# Altium PCB Clock Car.PcbDoc (part 2 of 2)
Units mil, origin at the board's own origin, x right, y up, seen from the top; angles counter-clockwise.
Board outline 1450 x 3300 mil, 4 copper layers (TOP, GND, PWR, BOT), stack 60.556 mil thick; 84 components, 67 nets, 314 pads, 152 vias.
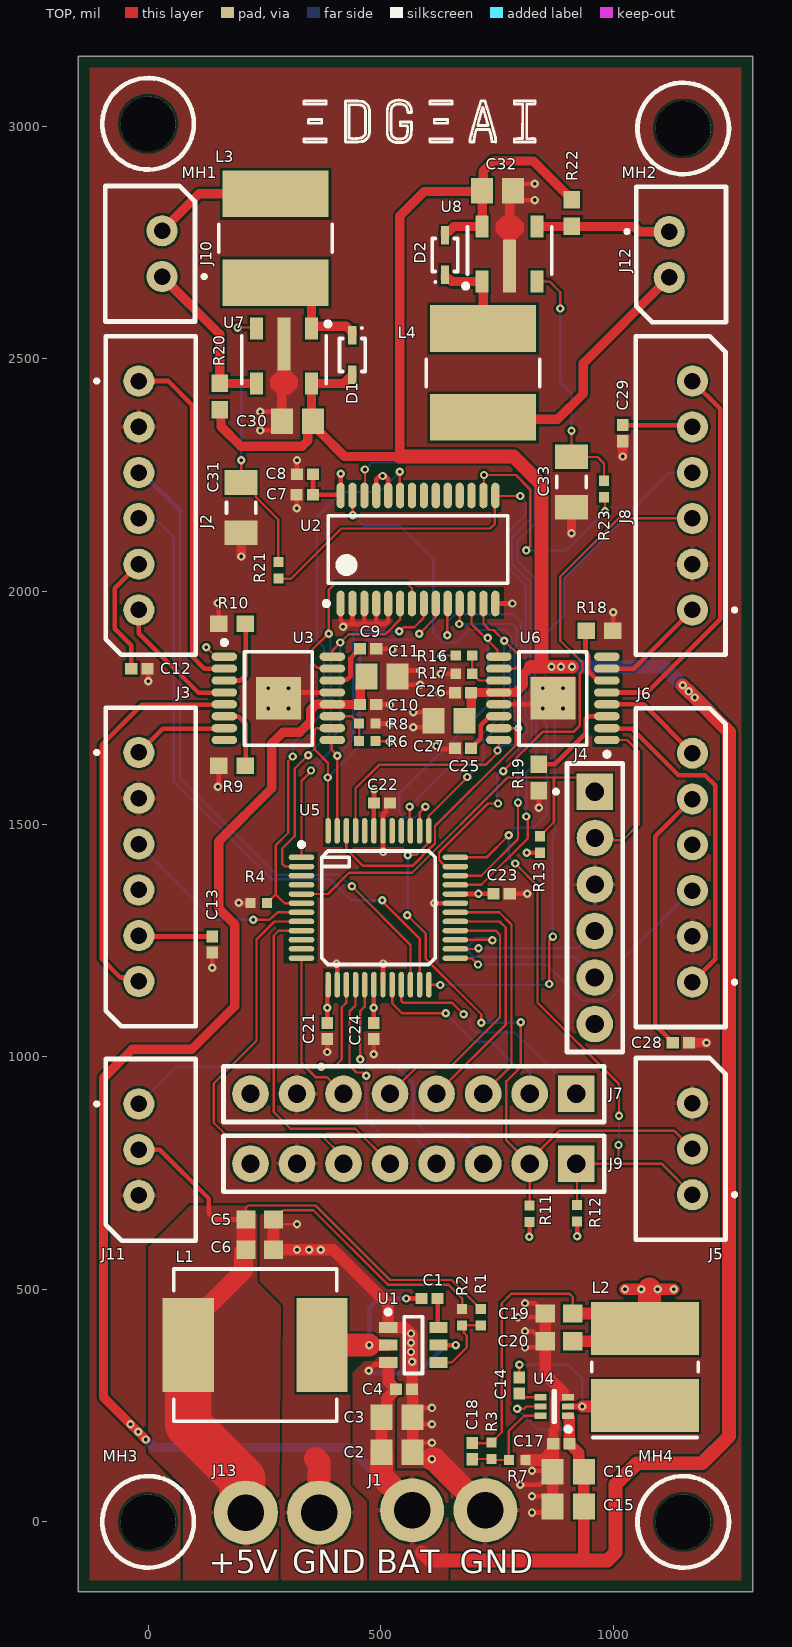
[diagram p0: TOP view]

## Via types
v1: diameter 18/18 (per signal layer), hole 8, TOP to BOT, tented top, 88 vias
v2: diameter 18, hole 8, TOP to BOT, tented top, 56 vias
v3: diameter 19.68, hole 7.87, TOP to BOT, 8 vias

## Nets (pads, with @x,y where several pads share a name; then routed paths per layer and width w, separated by ;. In a path a pad name is that pad's centre, name@x,y a point inside that pad or via, vN(x,y) a via of type N, cw(c..) or ccw(c..) an arc to the next point about the centre after c; other vN are vias at no path point) (continued)
B_ENC_A: (continued)
  TOP w5: v1(226,1294) 260.86,1294 267.33,1300.47 268.47,1300.47 278.16,1310.16 U5.7
  BOT w5: J3.3 142.85,1294 v1(226,1294)
C+: J6.1 U6.2 | length 727.1
  TOP w10: U6.2 987.17,1705 1040,1705 1140,1605 1197,1605 1219,1583 1219,1209 J6.1
C-: J6.6 U6.4 | length 227.4
  TOP w10: U6.4 1064.92,1757.2 J6.6
C_CCW: U2.11 U5.46 U6.15 | length 1018.7
  TOP w5: U5.46 426.1,1445.9 462,1410 568,1410 608.3,1450.3 608.82,1450.3 616.67,1458.15 616.67,1495.67 790,1669 790,1703.09 v1@787.09,1706 ; v1(669,1930) 669.57,1930.57 U2.11 ; U6.15 v1@787.09,1706 ; v1(796.05,1706) v1@787.09,1706
  BOT w5: v1(669,1930) 783,1930 792,1921 792,1883.02 788,1879.02 788,1715.43 796.05,1707.38 v1(796.05,1706)
C_CW: U2.10 U5.45 U6.16 | length 1047.9
  TOP w5: U5.45 445.79,1576.79 496,1627 725,1627 v1@753.5,1655.5 ; v1(643,1905.73) 643,1972.88 U2.10 ; v1@753.86,1658 U6.16
  BOT w5: v1(643,1905.73) 643,1934 660,1951 785,1951 802,1934 802,1878.88 799.5,1876.38 799.5,1730.24 814,1715.74 814,1696 788,1670 763,1670 v1(751,1658)
C_ENC_A: J6.3 U5.25 | length 679.7
  TOP w5: U5.25 695.27,1211.73 v1(709,1198)
  BOT w5: v1(709,1198) 856,1198 934,1120 989,1120 1019,1150 1019,1208 1167.85,1356.85 J6.3
CS: J7.2 U5.20 | length 443.1
  TOP w5: U5.20 524.53,1114.47 546,1093 v1(640,1093)
  BOT w5: v1(640,1093) 701,1032 737,1032 793,976 810,976 820,966 J7.2
D+: J8.1 U6.7 | length 236.9
  TOP w10: U6.7 1041.93,1833.98 1042.95,1832.95 J8.1
D-: J8.6 U6.5 | length 846
  TOP w10: U6.5 1072.8,1782.8 1230,1940 1230,2392.13 J8.6
D_CCW: U2.13 U5.39 U6.10 | length 711.5
  TOP w5: v1(562,1537) 562,1513.34 562.59,1512.75 562.59,1486.66 U5.39 ; U2.13 720.75,1930.25 734,1917 742.5,1917 v1(765.5,1894) 797,1862.5 797,1842 788.98,1833.98 U6.10
  BOT w5: v1(562,1537) 765,1740 765,1811.49 761.5,1814.99 765.5,1818.99 v1(765.5,1894)
D_CW: U2.12 U5.38 U6.9 | length 746.6
  TOP w5: U5.38 583.58,1524.58 v1(596,1537) ; U2.12 695,1973.7 695,1930 742,1883 ; v1(730,1900) 730,1895 742,1883 ; U6.9 751,1862.43 751,1874 742,1883
  BOT w5: v1(596,1537) 573,1514 549,1514 547.02,1515.98 540,1523 540,1565.36 735,1760.36 730,1765.36 v1(730,1900)
D_ENC_A: J8.3 U5.35 | length 1190
  TOP w5: U5.35 639.43,1408.58 625.3,1422.72 625.3,1438.49 730.81,1544 v1(752,1544) ; v1(763.51,1613.73) 847.79,1698 914,1698 928,1712 928,1823.18 933.5,1828.68 933.5,1847.32 920.32,1860.5 919.5,1860.5 886,1894 886,2032 1010.85,2156.85 J8.3
  BOT w5: v1(752,1544) 750,1546 750,1606 755.24,1611.24 761.03,1611.24 v1(763.51,1613.73)
D_ENC_B: J8.4 U5.24 | length 1537.8
  TOP w5: U5.24 627.35,1154.65 v1(628,1154) ; v1(862,1156) 862,1250 v1(870,1258)
  BOT w5: v1(628,1154) 860,1154 v1(862,1156) ; v1(870,1258) 870,1479.38 874.31,1483.69 874.31,1725.69 866,1734 866,1807.15 847,1826.15 847,1901 893,1947 893,2027 1121.28,2255.28 J8.4
GND: C2.1 C3.1 C4.1 C5.1 C6.1 C7.1 C8.1 C9.1 C10.1 C11.1 C12.1 C13.1 C15.1 C16.1 C17.1 C19.1 C20.1 C21.1 C22.1 C23.1 C24.1 C25.1 C26.1 C27.1 C28.1 C29.1 C30.1 C31.1 C32.1 C33.1 J1.2 J2.2 J3.2 J4.3 J5.3 J6.2 J7.7 J8.2 J9.7 J11.3 J13.2 R2.1 R4.1 R7.1 R8.1 R9.1 R10.1 R17.1 R18.1 R19.1 U1.1 U2.1 U2.2 U2.3 U2.4 U2.5 U2.14 U2.24 U2.25 U3.13 U3.17 U4.3 U5.14 U5.19 U5.31 U5.42 U6.13 U6.17 U7.2 U8.2 | length 5222.5
  TOP w5: v2(320,640) 279.53,640 C5.1 270.51,650 290.51,670 355,670 515,510 645,510 675,480 R2.1
  TOP w10: C12.1 0,1832.32 v1(0,1807) ; R10.1@137.76,1943.7 137.76,1942.72 150.47,1930 R10.1 151.46,1973.54 v1(150,1975) ; v1(138,1191) C13.1 ; v1(150,1580) 151.46,1581.46 R9.1 ; v1(195,1331) 196,1330 R4.1 ; v2(241,2346) 268.91,2346 287.54,2364.62 C30.1 287.54,2367.38 268.91,2386 v2(241,2386) ; U3.17 292.8,1782.8 U3.13 ; v1(319.35,2178.65) C7.1 ; C8.1 319.68,2281.68 v1(320,2282) ; v2(385,1010) C21.1 ; v2(405,1200) 406.42,1198.58 U5.14 ; U2.1 413.66,1938.34 v1@422,1930 ; v1(419,1924) 422,1927 v1@422,1930 ; U2.2 439.25,1932.75 442,1930 ; U2.3 464.84,1931.84 463,1930 ; v2(485,1005) C24.1 ; R8.1 518,1716 v2(519,1715) ; C10.1 519,1757 v2(520,1756) ; C9.1 520.84,1877 522.84,1875 v2(525,1875) ; U2.4 490.43,1933.93 486.5,1930 ; U2.25 490.43,2241.14 496.29,2247 510.14,2247 516,2241.14 U2.24@516,2206.17 ; U5.19 504.84,1199.84 v2(505,1200) ; v2(505,1440) 505,1485.2 U5.42 505,1485.51 505,1520 512.01,1527.01 512.01,1537.8 519.21,1545 C22.1 ; U2.5 516.02,1936.02 510,1930 486.5,1930 ; v2(570,1708) 599.54,1708 C27.1 595.54,1740 v2(570,1740) ; v2(585,1799) 554.46,1799 C11.1 549.46,1830 v2(585,1830) ; v2(610,135) 583.46,135 C2.1 588.46,170 v2(610,170) ; v2(610,210) 583.46,210 C3.1 588.46,245 v2(610,245) ; v2(615,1330) 660.2,1330 U5.31 ; v2(619.16,1667.84) 626,1661 657.68,1661 C25.1 ; v2(627,1781) 628,1782 C26.1 ; v2(629,1823) R17.1 ; U2.14 782.86,1973.86 v1(783,1974) ; U6.13 857.2,1757.2 U6.17 ; C23.1 v2(815,1350) ; C32.1 799.46,2876 v2(831,2876) ; v2(795,440) 835.47,440 840.47,435 C19.1 831.47,470 v2(810,470) ; v2(800,80) 841.54,80 846.98,85.44 850.91,85.44 869.54,104.06 C16.1 867.54,110 v2(825,110) ; C32.1@803.09,2841 v2(831,2841) ; v2(810,375) 840.47,375 C20.1 838.79,402.69 834.26,402.69 826.95,410 v2(810,410) ; v2(825,20) 856.54,20 C15.1 847.54,55 v2(825,55) ; v1(840,1535) R19.1 ; R18.1 1000,1916.46 v1(1000,1955) ; v1@422,1930 442,1930 ; 442,1930 463,1930 ; 463,1930 486.5,1930
  TOP w20: v1(200,2075) C31.1 ; C30.1@287.54,2367.38 287.54,2483.82 292,2488.28 U7.2 ; U8.2 777,2853.54 C32.1 ; C17.1 870.68,197.02 874.73,201.07 874.73,261.1 883.52,269.89 U4.3@894.89,269.89 ; v1(910,2125) C33.1 ; v1(1020,2290) C29.1 ; C28.1 v1(1200,1030)
  TOP w25: C5.1 C6.1 v2(320,585) v2(346,585) v2(371,585) 398,585 516,467 516,417.54 U1.1 552.68,417.4 567.32,402.76 v2(567.32,343.88) C4.1 567.52,285 567.81,284.7 567.81,283.72 568.46,283.07 C3.1 C2.1 ; R7.1 848.68,133 870.68,155 ; C19.1 C20.1 853.47,316.74 891.92,278.29 ; C15.1 C16.1@869.54,104.06 ; C16.1 870.68,109.14 870.68,155 ; C17.1 870.68,155
  TOP w50: 360,136 367.48,128.52 J13.2 ; v2(610,135) 615,135 J1.2
  other v1: 504,2248
  other v2: 565,365 565,385 565,405
  other v3: 258.35,1748.35 301.65,1748.35 848.35,1748.35 891.65,1748.35 258.35,1791.65 301.65,1791.65 848.35,1791.65 891.65,1791.65
GPIO1: J9.3 U5.17 | length 577
  TOP w5: v1(456,994) 456,1098 465.47,1107.47 U5.17
  BOT w5: v1(456,994) 472,978 535,978 570,943 570,864 599,835 671,835 720,786 J9.3
GPIO2: J9.4 U5.16 | length 514.3
  TOP w5: U5.16 445.79,1109.79 433,1097 433,981 448,966 462,966 v1(469,959)
  BOT w5: v1(469,959) 469,865 501,833 567,833 620,780 J9.4
GPIO3: J9.5 U5.9 | length 739.1
  TOP w5: U5.9 280.79,1270.79 270,1260 270,881 306,845 445,845 J9.5
GPIO4: J9.6 U5.8 | length 867.8
  TOP w5: U5.8 271.47,1290.47 233,1252 233,1034 141,942 141,858 167,832 371,832 420,783 J9.6
INT: J7.6 U5.12 | length 343.2
  TOP w5: U5.12 329.65,986.35 360,956 384,956 J7.6
LED1: R21.1 U2.15 U5.34 | length 1589.1
  TOP w5: R21.1 307.28,2027.28 415,2135 735,2135 745,2145 745,2204.8 U2.15 747.48,2205 v1(800,2205) ; U5.34 715.9,1388.9 795,1468 v1(795,1546)
  BOT w5: v1(795,1546) 795,1654 824,1683 824,1719.88 811,1732.88 811,1873.74 812,1874.74 812,2013 772,2053 772,2125 811,2164 811,2192.67 800,2203.67 v1(800,2205)
LED2: R23.1 U2.16 U5.33 | length 1634.2
  TOP w5: U5.33 716.21,1369.21 816,1469 816,1513 v1(813,1516) ; U2.16 722,2207.39 v1(722,2250) 790,2250 821,2219 821,2096.19 v1(812.81,2088) ; R23.1 982,2200.28 v1(982,2172)
  BOT w5: v1(722,2250) 792,2250 821,2221 821,2155 782,2116 782,2059 822,2019 822,1870.6 821,1869.6 821,1737.02 834,1724.02 834,1632.27 813,1611.27 v1(813,1516) ; v1(812.81,2088) 898,2088 v1(982,2172)
MCLR_n: J4.1 R13.1 U5.5 | length 885.5
  TOP w5: U5.5 386.53,1349.53 432,1395 567.67,1395 772.67,1600 872,1600 ; R13.1 872,1503.72 872,1600 ; J4.1 929.32,1600 872,1600
MISO: J7.4 U5.29 | length 532.9
  TOP w5: J7.4 769,1069 769,1277 755.53,1290.47 U5.29
MOSI: J7.3 U5.30 | length 520.7
  TOP w5: U5.30 754.84,1310.16 781,1284 781,981 J7.3
NetC1_1: C1.1 U1.6 | length 58.3
  TOP w10: C1.1@622.32,475 622.32,419.21 U1.6
NetC1_2: C1.2 L1.1 U1.2 | length 343.1
  TOP w10: v1(555,480) C1.2
  TOP w25: v1(475,380) U1.2
  TOP w50: L1.1 v1(475,380)
  BOT w10: v1(475,380) 475,460 495,480 v1(555,480)
NetC9_2: C9.2 U3.14 | length 110.9
  TOP w10: U3.14 397.62,1809.86 426.86,1809.86 435,1818 435,1856.32 447.68,1869.01 447.68,1869.8 454.89,1877 C9.2
NetC14_1: C14.1 U4.4 | length 48.8
  TOP w5: C14.1 805.99,267.69 U4.4
NetC14_2: C14.2 L2.1 U4.2 | length 401.5
  TOP w5: C14.2 v1(798,338)
  TOP w12: U4.2 v1(933,248)
  TOP w25: v1(933,248) 1065.68,248 L2.1
  BOT w5: v1(798,338) 903,338 933,308 v1(933,248)
NetC18_1: C18.1 R3.1 R7.2 U4.6 | length 223.6
  TOP w5: C18.1 697.61,135.28 R3.1 740.28,133 R7.2 775.28,195.28 808.31,228.32 U4.6
NetC25_2: C25.2 U6.14 | length 105.3
  TOP w10: C25.2 695.11,1663 702.32,1670.2 702.32,1670.99 715,1683.68 715,1712.54 734.08,1731.61 U6.14
NetC31_2: C31.2 R21.2 U7.3 | length 586.6
  TOP w5: v1(192,2567) 231,2567 U7.3 ; v1(200,2282) C31.2 207.07,2234.13 231.15,2210.06 231.15,2202.99 280,2154.13 R21.2
  BOT w5: v1(192,2567) 200,2559 v1(200,2282)
NetC33_2: C33.2 R23.2 U8.3 | length 536.4
  TOP w5: U8.3 863.06,2665.94 886,2643 v1(886,2608) ; v1(910,2345) C33.2 910.13,2289 966,2289 980,2275 R23.2
  BOT w5: v1(886,2608) 886,2449 910,2425 v1(910,2345)
NetD1_1: D1.1 L3.1 U7.1 | length 311.5
  TOP w20: L3.1@233.8,2623.33 L3.1 295.86,2663.53 336.06,2623.33 351.06,2623.33 U7.1@351.06,2566.22 ; U7.1 U7.1@351.06,2566.22 ; D1.1 439,2558.87 437.86,2560.01 435.99,2560.01 426,2570 354.83,2570 U7.1@351.06,2566.22
NetD2_1: D2.1 L4.1 U8.1 | length 192.8
  TOP w20: D2.1 638,2672.13 639.14,2670.99 647.69,2670.99 652.73,2665.94 U8.1 720,2663.89 L4.1
NetJ10_1: J10.1 R20.1 U7.4 | length 359.6
  TOP w20: J10.1 154,2552.57 R20.1 154.6,2446.94 U7.4
NetJ10_2: J10.2 L3.2 | length 333.8
  TOP w20: J10.2 109.47,2854.47 L3.2 L3.2@233.8,2814.28
NetJ12_1: J12.1 R22.1 U8.4 | length 290.3
  TOP w20: U8.4 836.46,2784.46 R22.1 1044.54,2784.46 1056,2773 1116.43,2773 1118.43,2775 J12.1
NetJ12_2: J12.2 L4.2 | length 566.1
  TOP w20: L4.2 724.06,2370 880,2370 935,2425 935,2490 J12.2
NetR1_1: R1.1 R2.2 U1.4 | length 165.7
  TOP w5: U1.4 652.6,342.6 685,375 685,400 678.11,406.89 678.11,419.17 R2.2 R1.1
NetR6_1: R6.1 R8.2 U3.11 | length 101.6
  TOP w5: U3.11 437.67,1731.61 R8.2 R6.1
NetR9_2: R9.2 U3.6 | length 143.6
  TOP w10: U3.6 165.32,1730.16 194.84,1730.16 210,1715 210,1626.46 R9.2
NetR10_2: R10.2 U3.3 | length 161.6
  TOP w10: U3.3 198.39,1808.39 210,1820 210,1928.54 R10.2
NetR16_1: R16.1 R17.2 U6.11 | length 102.2
  TOP w5: R16.1 R17.2 711.33,1808.39 U6.11
NetR18_2: R18.2 U6.6 | length 137.9
  TOP w10: R18.2 940,1913.54 940,1868.52 946,1862.52 946,1828.75 966.36,1808.39 U6.6
NetR19_2: R19.2 U6.3 | length 206.6
  TOP w10: R19.2 873.54,1628.54 940.5,1695.5 940.5,1725.76 946.36,1731.61 U6.3
OE: R4.2 U2.23 U5.6 | length 1219.7
  TOP w5: R4.2 274,1348.28 274,1349 ; v1(311,1645) 301,1635 301,1481 274,1454 274,1349 ; U5.6 293.16,1329.84 274,1349 ; v1(541,2257) 541,2206.76 U2.23
  BOT w5: v1(311,1645) 311,1673 378,1740 378,1880 363,1895 363,2160 416,2213 497,2213 v1(541,2257)
PGC: J4.5 U5.27 | length 448.4
  TOP w5: U5.27 738.9,1251.1 v1(740,1250)
  BOT w5: v1(740,1250) 736.48,1250 731.48,1255 705,1255 688,1238 688,1226 699.5,1214.5 915.5,1214.5 J4.5
PGD: J4.4 U5.26 | length 315.6
  TOP w5: U5.26 708.42,1231.42 v1(710,1233)
  BOT w5: v1(710,1233) 923,1233 J4.4
RST: J7.1 U5.21 | length 502.2
  TOP w5: U5.21 544.21,1119.79 548,1116 653,1116 v1(678,1091)
  BOT w5: v1(678,1091) 692,1077 692,1061.93 694.93,1059 695,1059 702,1052 788,1052 J7.1
SCK: J7.5 U5.28 | length 581.6
  TOP w5: J7.5 577,977 649,977 756.5,1084.5 756.5,1261.5 747.21,1270.79 U5.28
SCL: J5.1 J9.1 R12.1 U2.26 U5.36 | length 2615.4
  TOP w5: U2.26 466,2207.3 v1(466,2262) ; U5.36 727.27,1428.27 v1(775,1476) ; v1(789,1415) 837,1367 837,1116 1012,941 v1(1012,873) ; R12.1 922,768 J9.1 1011.57,770 ; v1(1011,810) 1011,770.57 1011.57,770 ; J5.1 1103.15,770 1011.57,770
  BOT w5: v1(466,2262) 481,2277 800,2277 831,2246 831,2145 793.5,2107.5 793.5,2065.5 832,2027 832,1866.45 831,1865.46 831,1741.16 856.5,1715.67 856.5,1520.43 828.07,1492 791,1492 v1(775,1476) 775,1429 v1(789,1415) ; v1(1011,810) 1012,811 v1(1012,873)
SDA: J5.2 J9.2 R11.1 U2.27 U5.37 | length 2519
  TOP w5: U2.27 440,2205.39 v1(440,2164) ; v1(557,1304) 597,1264 597,1210 716,1091 v1(716,1073) ; v1(558,1433) 559,1434 577,1434 600.51,1457.51 600.51,1459.09 603.27,1461.86 U5.37 603.27,1517.27 685,1599 685,1600 v1(686,1601) ; v1(801,1074) 801,978 770,947 770,820 J9.2 ; R11.1 J9.2 ; J5.2 1130.57,841 884,841 820,777 J9.2
  BOT w5: v1(440,2164) 463,2141 541,2141 613,2069 613,1912 635.77,1889.23 660.23,1889.23 688,1917 765.83,1917 782,1900.83 782,1887.17 778,1883.17 778,1735 721,1678 721,1636 v1(686,1601) ; v1(557,1304) 558,1305 v1(558,1433) ; v1(716,1073) 800,1073 v1(801,1074)
UART_IN: J11.1 U5.15 | length 640.4
  TOP w5: v1(372,978) 400,978 416,994 416,1106 426.1,1116.1 U5.15
  BOT w5: J11.1 59.57,978 v1(372,978)
pads on no net: J3.4 J4.6 J6.4 MH1.1 MH2.1 MH3.1 MH4.1 U2.17 U2.18 U2.19 U2.20 U2.21 U2.22 U3.8 U5.3 U5.4 U5.10 U5.11 U5.40 U5.41 U5.44 U6.8

## Polygon pours and split planes (outlines as drawn)
GND on TOP "GND_L01_P002" (solid, pour order 2): -125,-125 1275,-125 1275,3125 -125,3125
+5V on TOP "+5V_L01_P001" (solid, pour order 1): 280,-125 75,-125 75,75 0,150 0,590 90,680 235,680 235,515 285,465
+BATT on TOP "+BATT_L01_P000" (solid, pour order 0): 645,-125 645,60 595,110 530,110 530,325 535,330 535,355 495,355 485,345 465,345 440,320 440,80 475,45 475,-125
GND on BOT "GND_L04_P003" (solid, pour order 3): -133,-122.27 1267,-122.27 1267,3127.73 -133,3127.73
GND on GND (split plane): 1279.9,-129.9 -129.9,-129.9 -129.9,3129.9 1279.9,3129.9
+3V3 on PWR (split plane): 1279.9,-129.9 -129.9,-129.9 -129.9,3129.9 1279.9,3129.9

## Other copper
TOP:
  pour cut-out: 289,661 351,661 512.31,499.69 643.31,499.69 668,475 668,466 707,466 683,490 682,490 652,520 520,520 359,681 214,681 214,680 210,676 210,662
  pour cut-out: 625,1440 690,1440 690,1200 625,1200
  pour cut-out: 375,1515 375,1455 375,1450 615,1450 615,1515
  pour cut-out: 365,1440 365,1200 290,1200 290,1440
  pour cut-out: 375,1190 615,1190 625,1190 625,1114.94 375,1114.94
  pour cut-out: 365,1875 365,1670 425,1670 425,1875
  pour cut-out: 955,1875 1020,1875 1020,1665 955,1665
  pour cut-out: 725,1870 785,1870 785,1670 725,1670
  pour cut-out: 765,2010 765,1940 395,1940 395,2010
  pour cut-out: 400,2170 760,2170 760,2240 400,2240

## Silkscreen, mask and mechanical layers (free items; w line width, h text height)
Top Overlay:
  drawing of 258 lines, arcs and shapes, not listed
  text "+5V" at 130,-110 h50
  text "GND" at 310,-110 h50
  text "BAT" at 490,-110 h50
  text "GND" at 670,-110 h50